# EAGLE board prototypeV2.32 (EAGLE 9.5.2)
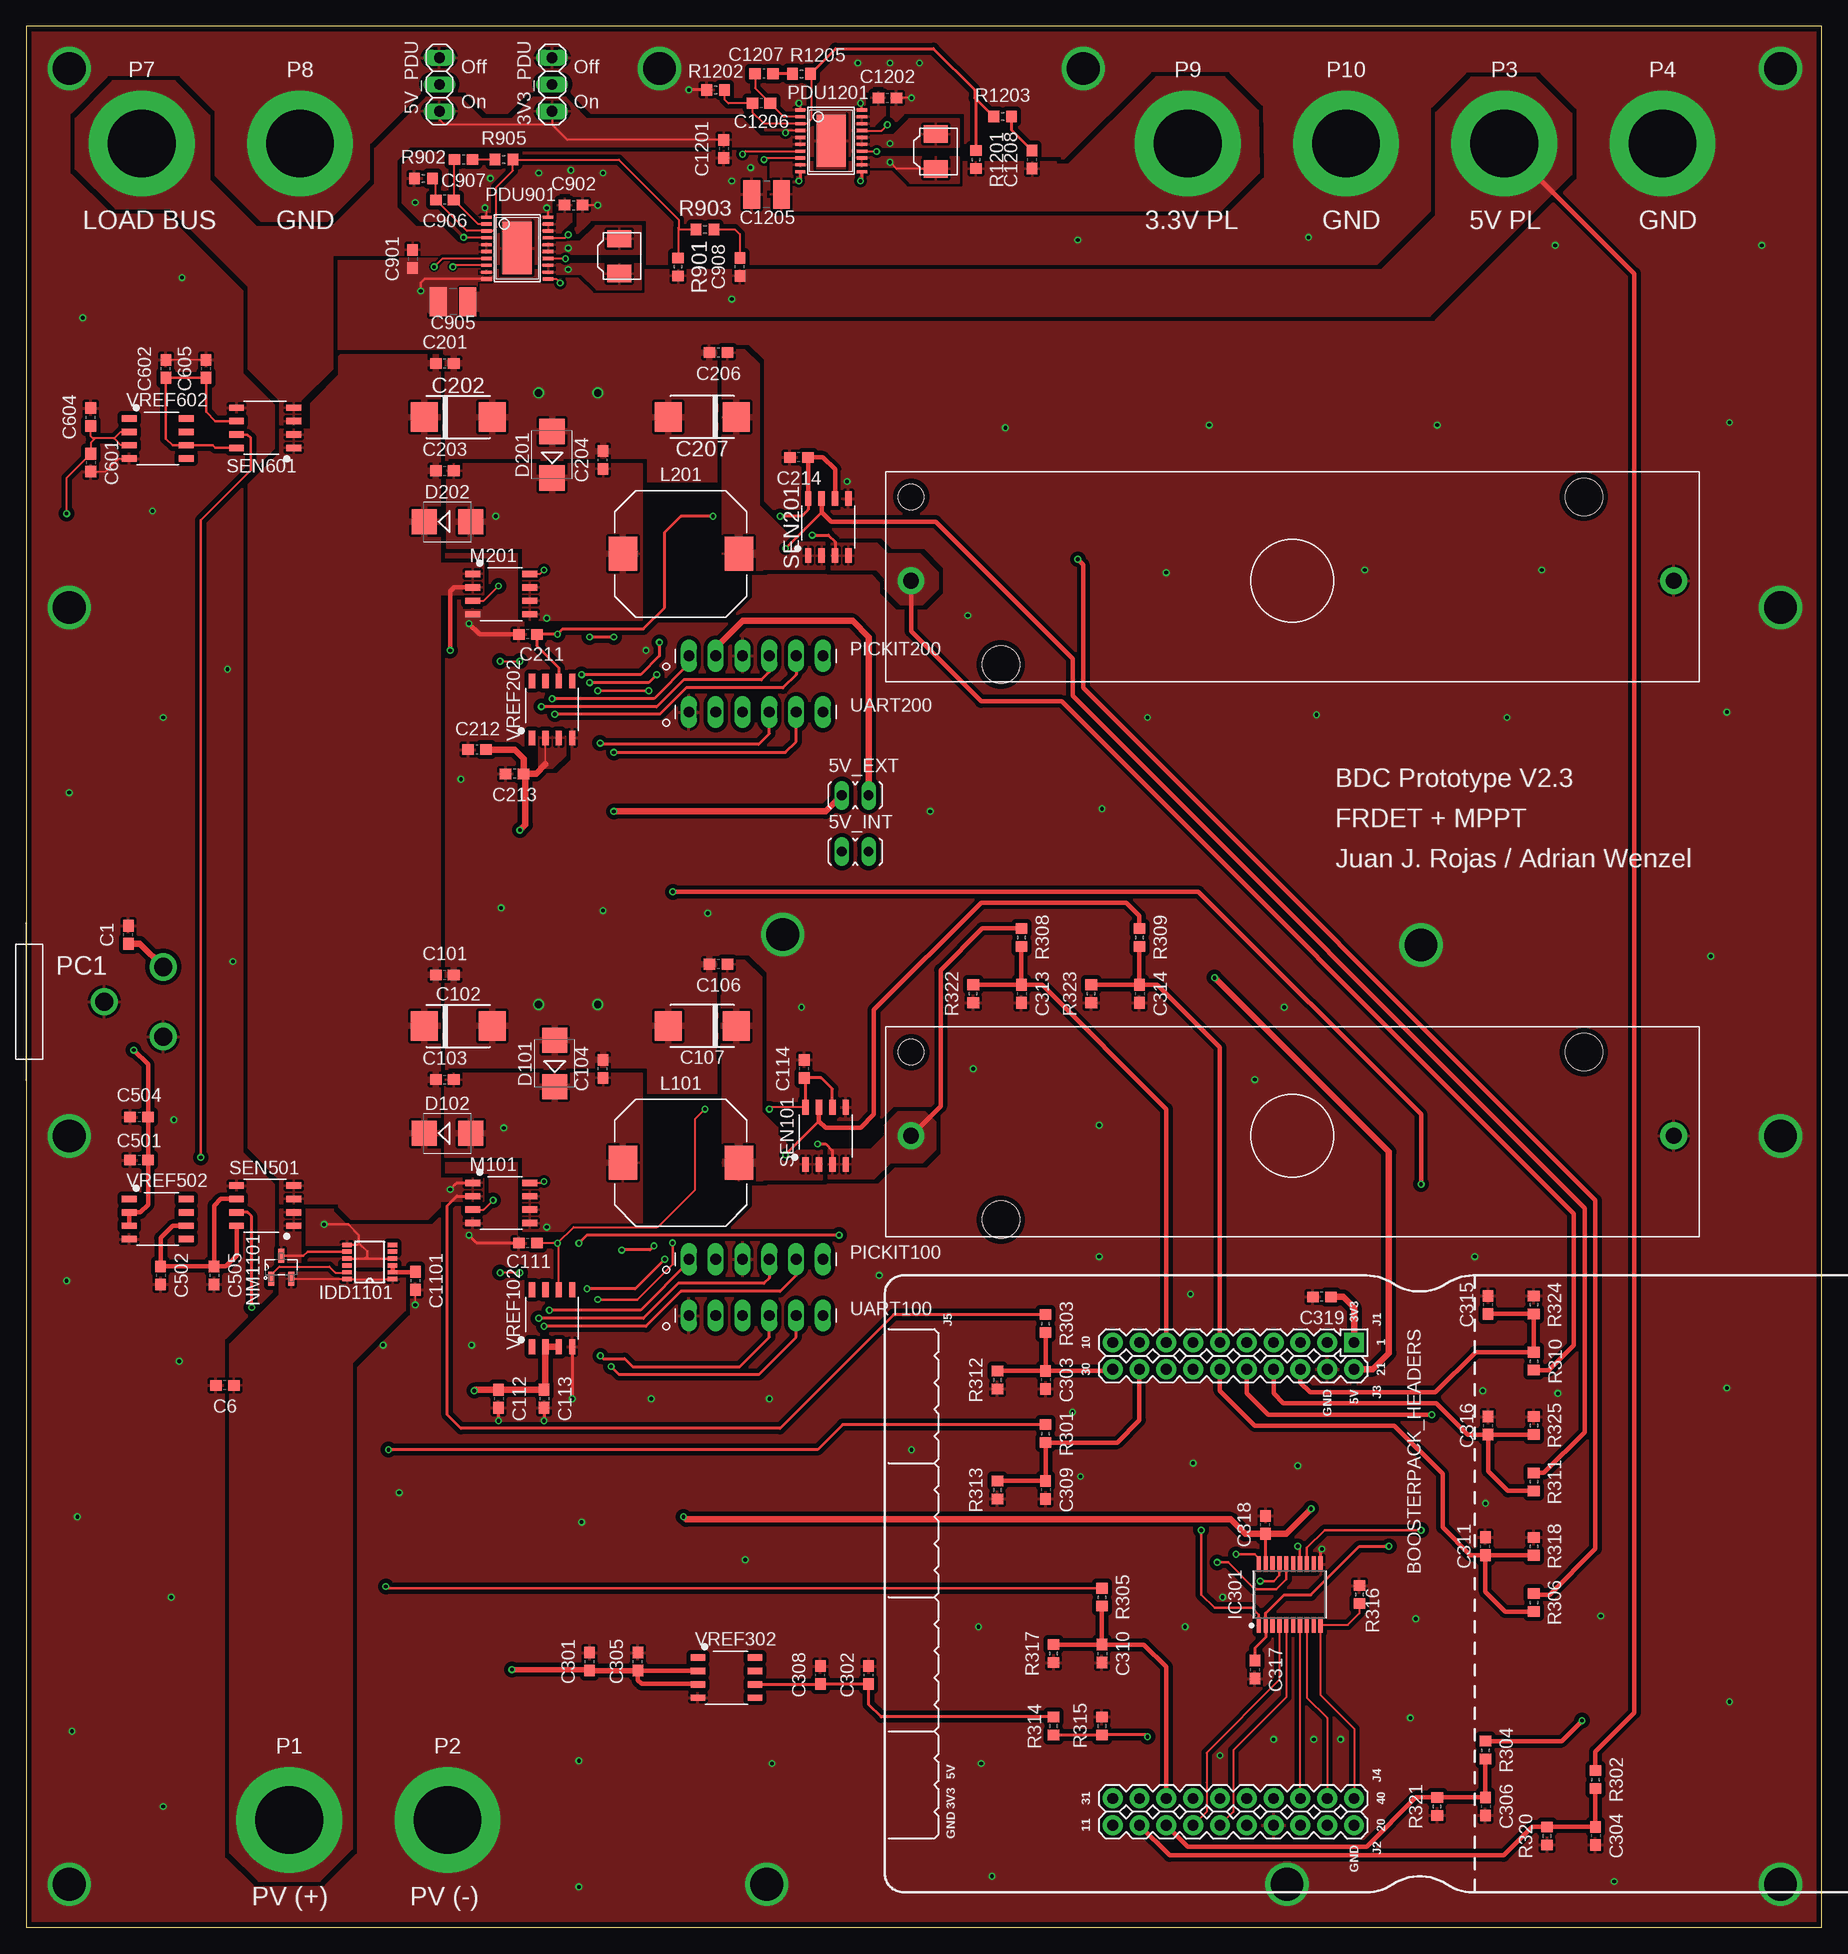
[diagram p0: board, top side]
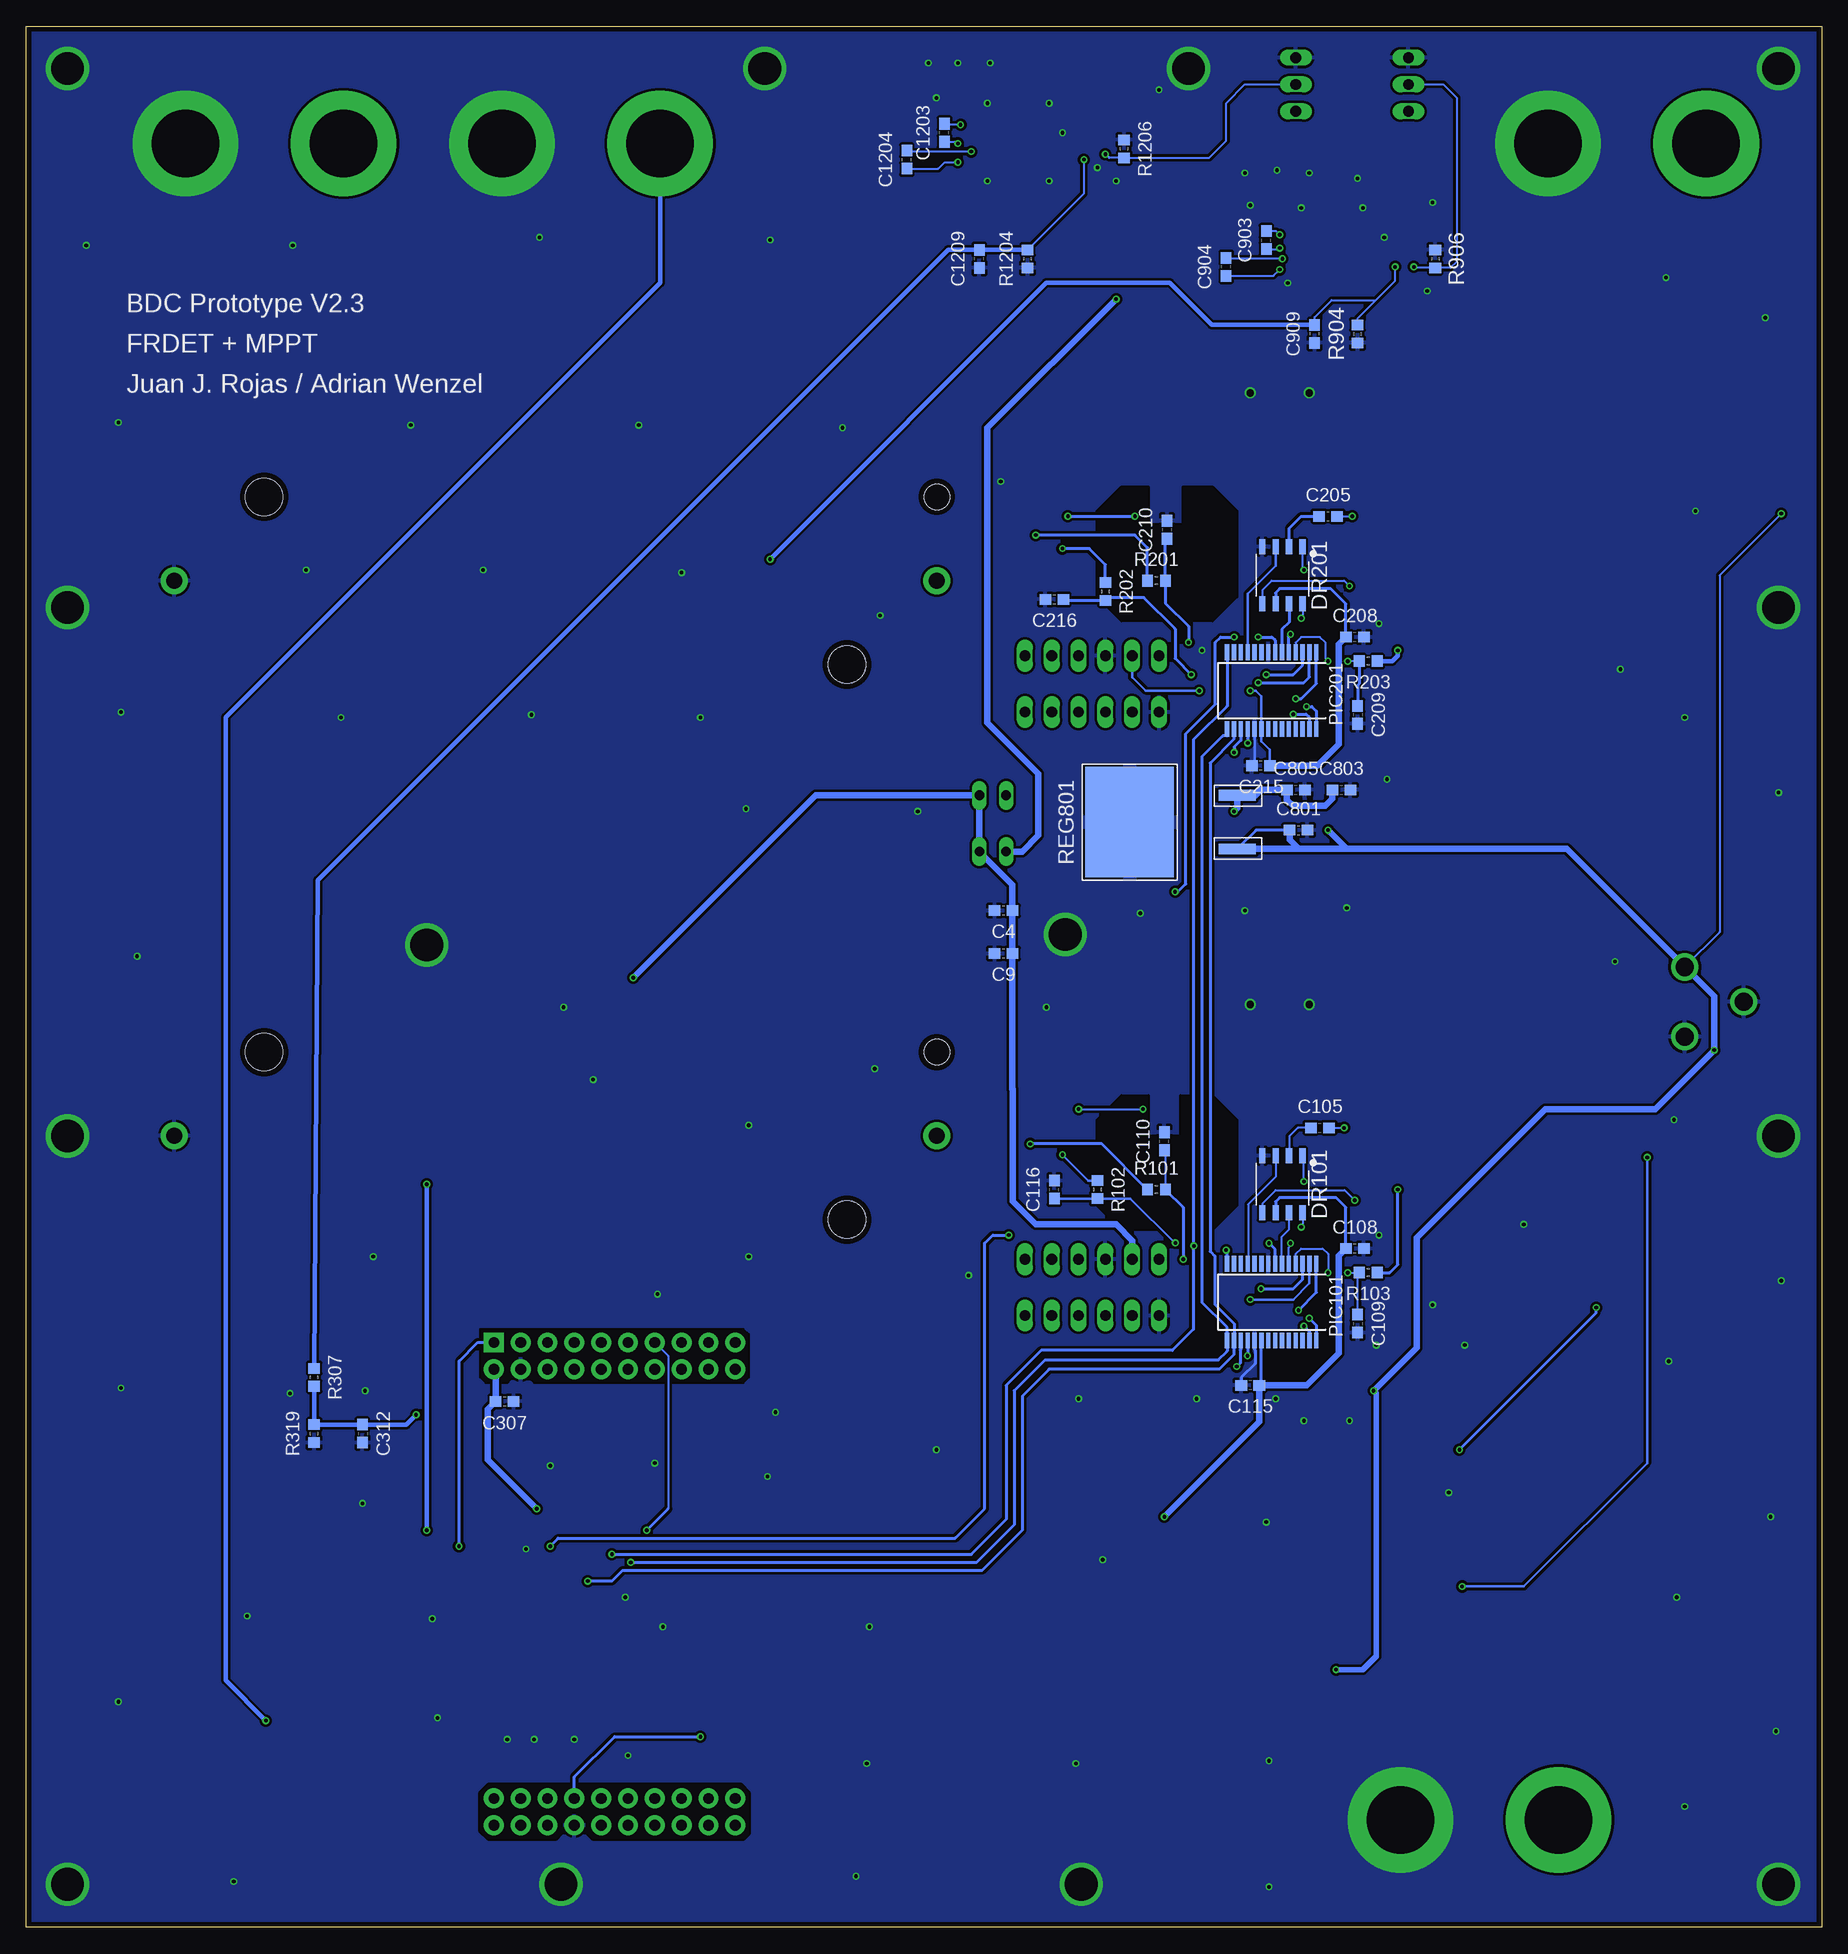
[diagram p1: board, bottom side, seen from below]

Size 170 x 180 mm. Coordinates in mm from the lower left corner, seen from the top.
Outline: 0,0 170,0 170,180 0,180 0,0
Copper layers (1*16): Top 0.035mm / dielectric 1.53mm / Bottom 0.035mm
Design rules "pban_5mil-l2": minimum track width 5mil, minimum drill 0.3mm, track to track 5mil, track to pad 0.229mm, pad to pad 5mil, via to via 5mil, smd to smd 5mil, copper to edge 0.5mm, drill to drill 0.5mm, minimum pad ring 0.15mm, minimum via ring 0.15mm, stop-mask expansion 4mil, vias tented up to drill 0.35mm, thermal gap 10mil

## Footprints (pad centres in the part's own frame; a part is rotated, then mirrored left to right if it is on the bottom)
1X03 = drill 1.016 long: 1 -2.54,0; 2 0,0; 3 2.54,0
J2P = drill 0.914 long: 1 0,-1.27; 2 0,1.27
C0603 = smd 1.1 x 1: 1 -0.85,0; 2 0.85,0
C7343 = smd 2.55 x 2.77: + -3.22,0; - 3.22,0
C1210 = smd 1.6 x 2.7: 1 -1.4,0; 2 1.4,0
18650_HOLDER = drill 1.5 pad 2.54: BB1.N 36.11,0; BB1.P -36.11,0 | hole 3.55: 27.6,7.935; -27.6,-7.935 | hole 2.4: -36.11,7.935
SMB = smd 2.4 x 2.4: A 2.2,0; C -2.2,0
SOIC-8 = smd 0.6 x 1.4: 1 -1.905,-2.7; 2 -0.635,-2.7; 3 0.635,-2.7; 4 1.905,-2.7; 5 1.905,2.7; 6 0.635,2.7; 7 -0.635,2.7; 8 -1.905,2.7
SOP65P640X120-20 = smd 1.469 x 0.402: 1 -2.871,2.925; 2 -2.871,2.275; 3 -2.871,1.625; 4 -2.871,0.975; 5 -2.871,0.325; 6 -2.871,-0.325; 7 -2.871,-0.975; 8 -2.871,-1.625; 9 -2.871,-2.275; 10 -2.871,-2.925; 11 2.871,-2.925; 12 2.871,-2.275; 13 2.871,-1.625; 14 2.871,-0.975; 15 2.871,-0.325; 16 2.871,0.325; 17 2.871,0.975; 18 2.871,1.625; 19 2.871,2.275; 20 2.871,2.925
MSOP12 = smd 0.9 x 0.42: 1 -2.163,1.625; 2 -2.163,0.975; 3 -2.163,0.325; 4 -2.163,-0.325; 5 -2.163,-0.975; 6 -2.163,-1.625; 7 2.15,-1.625; 8 2.15,-0.975; 9 2.15,-0.325; 10 2.15,0.325; 11 2.15,0.975; 12 2.15,1.625
BOOSTERPACK_HEADERS = drill 1.016 pad 1.88: !RST 22.86,-19.05; +5V -20.32,-8.89; GND -20.32,-11.43; GND@1 22.86,-8.89; P1.5 -22.86,-24.13; P1.6 22.86,-21.59; P1.7 22.86,-24.13; P2.3 20.32,-24.13; P2.4 20.32,-13.97; P2.5 22.86,-11.43; P2.6 20.32,-11.43; P2.7 20.32,-8.89; P3.0 22.86,-13.97; P3.2 -22.86,-13.97; P3.3 -22.86,-16.51; P3.5 20.32,-29.21; P3.6 22.86,-31.75; P3.7 20.32,-31.75; P4.0 -20.32,-16.51; P4.1 -22.86,-19.05; P4.2 -20.32,-19.05; P4.3 -22.86,-21.59; P4.4 -20.32,-21.59; P4.5 -20.32,-24.13; P4.6 -22.86,-26.67; P4.7 -20.32,-26.67; P5.0 22.86,-26.67; P5.1 20.32,-26.67; P5.2 22.86,-29.21; P5.4 -20.32,-29.21; P5.5 -20.32,-31.75; P5.6 20.32,-16.51; P5.7 22.86,-16.51; P6.0 -22.86,-11.43; P6.1 -20.32,-13.97; P6.4 -22.86,-31.75; P6.5 -22.86,-29.21; P6.6 20.32,-19.05; P6.7 20.32,-21.59 | drill 1.016 pad 1.88 square: +3V3 -22.86,-8.89
CLF12555 = smd 2.7 x 3.2: 1 -5.5,0; 2 5.5,0
SPM4020T = smd 1.65 x 2.3: 1 -1.65,0; 2 1.65,0
SOT-23 = smd 1.321 x 0.559: 1 -1.092,0.94; 2 -1.092,-0.94; 3 1.092,0
TJ-563 = drill 6.4 pad 10: P 0,0
722RA = drill 1.727: PIN 0,3.302; SLEEVE -5.588,0; SLEEVE_SHUNT 0,-3.302
TSSOP20CA = smd 0.305 x 0.991: 1 -2.925,-2.918; 2 -2.275,-2.918; 3 -1.625,-2.918; 4 -0.975,-2.918; 5 -0.325,-2.918; 6 0.325,-2.918; 7 0.975,-2.918; 8 1.625,-2.918; 9 2.275,-2.918; 10 2.925,-2.918; 11 2.925,2.918; 12 2.275,2.918; 13 1.625,2.918; 14 0.975,2.918; 15 0.325,2.918; 16 -0.325,2.918; 17 -0.975,2.918; 18 -1.625,2.918; 19 -2.275,2.918; 20 -2.925,2.918 | smd 4.95 x 2.74: 21 0,0
SSOP28 = smd 0.4 x 1.5: 1 -4.225,-3.625; 2 -3.575,-3.625; 3 -2.925,-3.625; 4 -2.275,-3.625; 5 -1.625,-3.625; 6 -0.975,-3.625; 7 -0.325,-3.625; 8 0.325,-3.625; 9 0.975,-3.625; 10 1.625,-3.625; 11 2.275,-3.625; 12 2.925,-3.625; 13 3.575,-3.625; 14 4.225,-3.625; 15 4.225,3.625; 16 3.575,3.625; 17 2.925,3.625; 18 2.275,3.625; 19 1.625,3.625; 20 0.975,3.625; 21 0.325,3.625; 22 -0.325,3.625; 23 -0.975,3.625; 24 -1.625,3.625; 25 -2.275,3.625; 26 -2.925,3.625; 27 -3.575,3.625; 28 -4.225,3.625
MA06-1 = drill 1.016 long: 1 -6.35,0; 2 -3.81,0; 3 -1.27,0; 4 1.27,0; 5 3.81,0; 6 6.35,0
R0603 = smd 1 x 1.1: 1 -0.85,0; 2 0.85,0
D2PAK-3 = smd 1.016 x 3.504: 1 -2.54,-10.213; 3 2.54,-10.213 | smd 10.49 x 8.38: 4 0,0

## Placement (x,y rotation side)
3V3_PDU  [1X03]  49.78,174.5 270 top
5V_EXT  [J2P]  78.49,107.19 270 top
5V_INT  [J2P]  78.49,101.85 270 top
5V_PDU  [1X03]  39.12,174.5 270 top
C1  10u  [C0603]  9.65,93.98 90 top
C4  0.1u  [C0603]  77.47,96.27 180 bottom
C6  1u  [C0603]  18.8,51.31 180 top
C9  10u  [C0603]  77.47,92.2 180 bottom
C101  1u  [C0603]  39.62,90.17 0 top
C102  33u  [C7343]  40.89,85.34 0 top
C103  1n  [C0603]  39.62,80.26 0 top
C104  1n  [C0603]  54.61,81.28 90 top
C105  1u  [C0603]  47.5,75.69 0 bottom
C106  1u  [C0603]  65.53,91.19 180 top
C107  33u  [C7343]  64.01,85.34 180 top
C108  2.2u  [C0603]  44.2,64.26 0 bottom
C109  0.1u  [C0603]  43.94,57.15 270 bottom
C110  0.1u  [C0603]  62.23,74.42 90 bottom
C111  1u  [C0603]  47.5,64.77 180 top
C112  10u  [C0603]  44.7,50.04 270 top
C113  1u  [C0603]  49.02,50.04 270 top
C114  0.1u  [C0603]  73.66,81.28 90 top
C115  0.1u  [C0603]  54.1,51.31 180 bottom
C116  1n  [C0603]  72.64,69.85 90 bottom
C201  1u  [C0603]  39.62,148.08 0 top
C202  33u  [C7343]  40.89,143 0 top
C203  1n  [C0603]  39.62,137.92 0 top
C204  1n  [C0603]  54.61,138.94 90 top
C205  1u  [C0603]  46.74,133.6 0 bottom
C206  1u  [C0603]  65.53,149.1 180 top
C207  33u  [C7343]  64.01,143 180 top
C208  2.2u  [C0603]  44.2,122.17 0 bottom
C209  0.1u  [C0603]  43.94,114.81 270 bottom
C210  0.1u  [C0603]  61.98,132.33 90 bottom
C211  1u  [C0603]  47.5,122.43 180 top
C212  10u  [C0603]  42.67,111.51 180 top
C213  1u  [C0603]  46.23,109.22 180 top
C214  0.1u  [C0603]  73.15,139.19 180 top
C215  0.1u  [C0603]  53.09,109.98 180 bottom
C216  1n  [C0603]  72.64,125.73 180 bottom
C301  10u  [C0603]  53.34,25.15 90 top
C302  1u  [C0603]  79.76,23.88 90 top
C303  1.2n  [C0603]  96.52,51.82 270 top
C304  1.2n  [C0603]  148.59,8.64 270 top
C305  1u  [C0603]  57.91,25.15 90 top
C306  1.2n  [C0603]  138.18,11.43 270 top
C307  0.1u  [C0603]  124.71,49.78 0 bottom
C308  0.1u  [C0603]  75.18,23.88 90 top
C309  1.2n  [C0603]  96.52,41.4 270 top
C310  1.2n  [C0603]  101.85,25.91 270 top
C311  1.2n  [C0603]  138.18,36.07 90 top
C312  1.2n  [C0603]  138.18,46.74 270 bottom
C313  1.2n  [C0603]  94.23,88.39 270 top
C314  1.2n  [C0603]  105.41,88.39 270 top
C315  1.2n  [C0603]  138.43,58.93 90 top
C316  1.2n  [C0603]  138.43,47.5 90 top
C317  0.1u  [C0603]  116.33,24.38 270 top
C318  0.1u  [C0603]  117.35,38.1 90 top
C319  0.1u  [C0603]  122.68,59.69 180 top
C501  10u  [C0603]  10.67,72.64 180 top
C502  1u  [C0603]  12.7,61.72 270 top
C504  1u  [C0603]  10.67,76.71 180 top
C505  0.1u  [C0603]  17.78,61.72 270 top
C601  10u  [C0603]  6.1,138.68 270 top
C602  1u  [C0603]  13.21,147.57 90 top
C604  1u  [C0603]  6.1,143 90 top
C605  0.1u  [C0603]  17.02,147.57 90 top
C801  0.33u  [C0603]  49.53,103.89 0 bottom
C803  1u  [C0603]  45.47,107.7 0 bottom
C805  10u  [C0603]  49.78,107.7 0 bottom
C901  10u  [C0603]  36.58,157.99 270 top
C902  1u  [C0603]  51.82,163.07 0 top
C903  0.1u  [C0603]  52.58,159.77 90 bottom
C904  0.1u  [C0603]  56.39,157.23 90 bottom
C905  47u  [C1210]  40.39,153.92 180 top
C906  22p  [C0603]  39.62,163.58 180 top
C907  680p  [C0603]  41.4,167.39 180 top
C908  47p  [C0603]  67.56,157.23 90 top
C909  100p  [C0603]  48.01,150.88 90 bottom
C1101  0.1u  [C0603]  36.83,61.21 270 top
C1201  22u  [C0603]  66.04,168.4 270 top
C1202  1u  [C0603]  81.53,173.23 0 top
C1203  0.1u  [C0603]  83.06,169.93 90 bottom
C1204  0.1u  [C0603]  86.61,167.39 90 bottom
C1205  47u  [C1210]  70.1,164.08 180 top
C1206  15p  [C0603]  69.6,172.72 180 top
C1207  820p  [C0603]  69.85,175.51 180 top
C1208  56p  [C0603]  95.25,167.39 90 top
C1209  100p  [C0603]  79.76,157.99 90 bottom
CELL1  CELL18650_HOLDER  [18650_HOLDER]  119.89,74.93 0 top
CELL2  CELL18650_HOLDER  [18650_HOLDER]  119.89,127.51 0 top
D101  BAQ133  [SMB]  50.04,81.79 90 top
D102  BAQ133  [SMB]  39.88,75.18 0 top
D201  BAQ133  [SMB]  49.78,139.45 90 top
D202  BAQ133  [SMB]  39.88,133.1 0 top
DR101  TPS28225D  [SOIC-8]  51.05,70.36 180 bottom
DR201  TPS28225D  [SOIC-8]  51.05,128.02 180 bottom
IC301  TXS0108E  [SOP65P640X120-20]  119.63,31.5 90 top
IDD1101  LTC4352CMS  [MSOP12]  32.51,62.99 180 top
JP301  BOOSTERPACK_HEADERS  [BOOSTERPACK_HEADERS]  134.62,32.51 270 top
L101  22u  [CLF12555]  61.98,72.39 0 top
L201  22u  [CLF12555]  61.98,130.05 0 top
L901  4.7u  [SPM4020T]  56.13,158.24 270 top
L1201  4.7u  [SPM4020T]  86.11,168.15 270 top
M101  SI4914BDY  [SOIC-8]  44.96,68.58 270 top
M201  SI4914BDY  [SOIC-8]  44.96,126.24 270 top
NM1101  IRLML6244TRPBF  [SOT-23]  24.13,62.48 90 top
P1  TJ-563  [TJ-563]  24.89,10.16 0 top
P2  TJ-563  [TJ-563]  39.88,10.16 0 top
P3  TJ-563  [TJ-563]  139.95,168.91 0 top
P4  TJ-563  [TJ-563]  154.94,168.91 0 top
P7  TJ-563  [TJ-563]  10.92,168.91 0 top
P8  TJ-563  [TJ-563]  25.91,168.91 0 top
P9  TJ-563  [TJ-563]  109.98,168.91 0 top
P10  TJ-563  [TJ-563]  124.97,168.91 0 top
PC1  722RA  [722RA]  12.95,87.63 0 top
PDU901  LTC3112EFE  [TSSOP20CA]  46.48,159 270 top
PDU1201  LTC3112EFE  [TSSOP20CA]  76.2,169.16 270 top
PIC101  PIC16F1786-I/SS  [SSOP28]  52.07,59.18 180 bottom
PIC201  PIC16F1786-I/SS  [SSOP28]  52.07,117.09 180 bottom
PICKIT100  [MA06-1]  69.09,63.25 0 top
PICKIT200  [MA06-1]  69.09,120.4 0 top
R101  200  [R0603]  62.99,69.85 0 bottom
R102  0  [R0603]  68.58,69.85 270 bottom
R103  200  [R0603]  42.93,61.98 180 bottom
R201  200  [R0603]  62.99,127.51 0 bottom
R202  0  [R0603]  67.82,126.49 270 bottom
R203  200  [R0603]  42.93,119.89 180 bottom
R301  12.4k  [R0603]  96.52,46.74 270 top
R302  23.2k  [R0603]  148.59,13.97 270 top
R303  23.2k  [R0603]  96.52,57.15 270 top
R304  12.4k  [R0603]  138.18,16.76 270 top
R305  12.4k  [R0603]  101.85,31.24 270 top
R306  12.4k  [R0603]  142.75,30.73 270 top
R307  12.4k  [R0603]  142.75,52.07 270 bottom
R308  12.4k  [R0603]  94.23,93.73 270 top
R309  12.4k  [R0603]  105.41,93.73 270 top
R310  12.4k  [R0603]  142.75,53.59 90 top
R311  12.4k  [R0603]  142.75,42.16 270 top
R312  23.2k  [R0603]  91.95,51.82 90 top
R313  23.2k  [R0603]  91.95,41.4 90 top
R314  12.4k  [R0603]  97.28,19.05 90 top
R315  23.2k  [R0603]  101.85,19.05 270 top
R316  10k  [R0603]  126.24,31.5 270 top
R317  23.2k  [R0603]  97.28,25.91 90 top
R318  23.2k  [R0603]  142.75,36.07 270 top
R319  23.2k  [R0603]  142.75,46.74 90 bottom
R320  23.2k  [R0603]  144.02,8.64 90 top
R321  23.2k  [R0603]  133.6,11.43 90 top
R322  23.2k  [R0603]  89.66,88.39 90 top
R323  23.2k  [R0603]  100.84,88.39 90 top
R324  23.2k  [R0603]  142.75,58.93 270 top
R325  23.2k  [R0603]  142.75,47.5 270 top
R901  845k  [R0603]  61.72,157.23 270 top
R902  158k  [R0603]  37.59,165.61 0 top
R903  10k  [R0603]  64.26,160.78 0 top
R904  42.2k  [R0603]  43.94,150.88 90 bottom
R905  33k  [R0603]  45.21,167.39 0 top
R906  10k  [R0603]  36.58,157.99 270 bottom
R1201  620k  [R0603]  89.92,167.39 270 top
R1202  200k  [R0603]  65.28,173.99 0 top
R1203  9.1k  [R0603]  92.46,171.45 0 top
R1204  42.2k  [R0603]  75.18,157.99 90 bottom
R1205  39k  [R0603]  73.41,175.51 0 top
R1206  10k  [R0603]  66.04,168.4 270 bottom
REG801  NCV7805BD2TG  [D2PAK-3]  65.53,104.65 90 bottom
SEN101  ACS723-05AB-T  [SOIC-8]  75.69,74.93 0 top
SEN201  ACS723-05AB-T  [SOIC-8]  75.95,132.59 0 top
SEN501  ACS723-05AB-T  [SOIC-8]  22.61,68.33 90 top
SEN601  ACS723-05AB-T  [SOIC-8]  22.61,141.99 90 top
UART100  [MA06-1]  69.09,57.91 0 top
UART200  [MA06-1]  69.09,115.06 0 top
VREF102  REF195GSZ  [SOIC-8]  49.78,57.66 0 top
VREF202  REF195GSZ  [SOIC-8]  49.78,115.32 0 top
VREF302  REF195GSZ  [SOIC-8]  66.29,23.62 270 top
VREF502  REF195GSZ  [SOIC-8]  12.45,67.06 270 top
VREF602  REF195GSZ  [SOIC-8]  12.45,140.97 270 top

## Library data of the parts
3V3_PDU 5V_PDU = pinhead
5V_EXT 5V_INT P1-P4 P7-P10 PC1 = Interfaces
C1 C4 C6 C9 C101-C116 C201-C216 C301-C319 C501 C502 C504 C505 C601 C602 C604 C605 C801 C803 C805 C901-C909 C1101 C1201-C1209 D101 D102 D201 D202 L101 L201 L901 L1201 R101-R103 R201-R203 R301-R325 R901-R906 R1201-R1206 = Pasives
CELL1 CELL2 = Sources
DR101 DR201 IDD1101 M101 M201 PDU901 PDU1201 PIC101 PIC201 REG801 SEN101 SEN201 SEN501 SEN601 VREF102 VREF202 VREF302 VREF502 VREF602 = ICs
IC301 = TI_LevelShifter
JP301 = MSP432_aux
NM1101 = ICs; RS_SN: 737-7228
PICKIT100 PICKIT200 UART100 UART200 = Interfaces; OC_FARNELL: unknown; OC_NEWARK: unknown

## Nets
3.3V_PL: C1205.1 C1208.1 P9.P PDU1201.9 R304.1 R1201.2
5V_EXT: 5V_EXT.1 C803.1 C805.1 REG801.3
5V_ON: 5V_PDU.2 PDU901.7 R906.2
5V_PL: 5V_INT.1 C905.1 C908.1 P3.P PDU901.9 R302.1 R901.2
7.5V: C1.1 C112.1 C113.1 C212.1 C213.1 C301.1 C305.1 C501.1 C504.1 C601.1 C604.1 C801.1 PC1.PIN REG801.1 VREF102.2 VREF102.3 VREF202.2 VREF202.3 VREF302.2 VREF302.3 VREF502.2 VREF502.3 VREF602.2 VREF602.3
12V_ON: 3V3_PDU.2 PDU1201.7 R1206.2
!SPI_SS1: IC301.14 PIC101.7
!SPI_SS2: IC301.13 PIC201.7
+5V: 5V_EXT.2 5V_INT.2 C4.1 C9.1 C108.1 C115.1 C208.1 C215.1 C307.1 C318.1 DR101.6 DR201.6 IC301.19 JP301.+5V PIC101.20 PIC201.20 PICKIT100.2 PICKIT200.2
CONTROL:3V3: C317.1 C319.1 IC301.2 JP301.+3V3
CONTROL:3V3_REF: JP301.P5.6 R314.1 R315.2
CONTROL:5V_REF: C302.1 C308.1 R314.2 VREF302.6
CONTROL:!SS1: IC301.7 JP301.P2.4
CONTROL:!SS2: IC301.8 JP301.P2.6
CONTROL:CLK: IC301.1 JP301.P1.5
CONTROL:I_BAT1: C314.1 JP301.P4.3 R309.2 R323.2
CONTROL:I_BAT2: C316.1 JP301.P4.0 R311.2 R325.2
CONTROL:I_LOAD: C310.1 JP301.P5.1 R305.2 R317.2
CONTROL:I_PDU_3.3V: C312.1 JP301.P4.2 R307.2 R319.2
CONTROL:I_PDU_5V: C311.1 JP301.P4.4 R306.2 R318.2
CONTROL:I_PV: C309.1 JP301.P5.4 R301.2 R313.2
CONTROL:MISO: IC301.4 JP301.P1.7
CONTROL:MOSI: IC301.5 JP301.P1.6
CONTROL:OE_SPI: IC301.10 JP301.P2.7 R316.2
CONTROL:V_BAT1: C313.1 JP301.P4.6 R308.2 R322.2
CONTROL:V_BAT2: C315.1 JP301.P6.1 R310.2 R324.2
CONTROL:V_BUS: C303.1 JP301.P5.5 R303.2 R312.2
CONTROL:V_PDU_3.3V: C306.1 JP301.P5.0 R304.2 R321.2
CONTROL:V_PDU_5V: C304.1 JP301.P5.2 R302.2 R320.2
CONV1:5V_REF: C111.1 C114.1 PIC101.5 SEN101.6 SEN101.8 VREF102.6
CONV1:DR_EN: DR101.7 PIC101.6
CONV1:G1: DR101.1 M101.8
CONV1:G2: DR101.5 M101.3
CONV1:I_BAT: C116.1 PIC101.2 R102.2
CONV1:ICSPCLK: PIC101.27 PICKIT100.5
CONV1:ICSPDAT: PIC101.28 PICKIT100.4
CONV1:LO: C106.1 C107.+ L101.2 SEN101.1 SEN101.2
CONV1:MCLR: PIC101.1 PICKIT100.1
CONV1:N$2: C105.1 DR101.2
CONV1:PWM: DR101.3 PIC101.11
CONV1:RX: PIC101.18 UART100.4
CONV1:SW: C103.2 C104.1 C105.2 D101.C D102.A DR101.8 L101.1 M101.5 M101.6 M101.7
CONV1:TX: PIC101.17 UART100.5
CONV1:V_BAT: C110.1 PIC101.3 R101.2
CONV1:V_BUS: C109.1 PIC101.4 R103.2
CONV2:5V_REF: C211.1 C214.1 PIC201.5 SEN201.6 SEN201.8 VREF202.6
CONV2:DR_EN: DR201.7 PIC201.6
CONV2:G1: DR201.1 M201.8
CONV2:G2: DR201.5 M201.3
CONV2:I_BAT: C216.1 PIC201.2 R202.2
CONV2:ICSPCLK: PIC201.27 PICKIT200.5
CONV2:ICSPDAT: PIC201.28 PICKIT200.4
CONV2:LO: C206.1 C207.+ L201.2 SEN201.1 SEN201.2
CONV2:MCLR: PIC201.1 PICKIT200.1
CONV2:N$2: C205.1 DR201.2
CONV2:PWM: DR201.3 PIC201.11
CONV2:RX: PIC201.18 UART200.4
CONV2:SW: C203.2 C204.1 C205.2 D201.C D202.A DR201.8 L201.1 M201.5 M201.6 M201.7
CONV2:TX: PIC201.17 UART200.5
CONV2:V_BAT: C210.1 PIC201.3 R201.2
CONV2:V_BUS: C209.1 PIC201.4 R203.2
GND: 3V3_PDU.1 5V_PDU.1 C1.2 C4.2 C6.2 C9.2 C101.2 C102.- C104.2 C106.2 C107.- C108.2 C109.2 C110.2 C111.2 C112.2 C113.2 C114.2 C115.2 C116.2 C201.2 C202.- C204.2 C206.2 C207.- C208.2 C209.2 C210.2 C211.2 C212.2 C213.2 C214.2 C215.2 C216.2 C301.2 C302.2 C303.2 C304.2 C305.2 C306.2 C307.2 C308.2 C309.2 C310.2 C311.2 C312.2 C313.2 C314.2 C315.2 C316.2 C317.2 C318.2 C319.2 C501.2 C502.2 C504.2 C505.2 C601.2 C602.2 C604.2 C605.2 C801.2 C803.2 C805.2 C901.2 C902.2 C905.2 C909.1 C1101.2 C1201.2 C1202.2 C1205.2 C1209.1 CELL1.BB1.N CELL2.BB1.N D101.A D201.A DR101.4 DR201.4 IC301.11 IDD1101.4 IDD1101.7 IDD1101.9 JP301.GND JP301.P5.7 M101.4 M201.4 P2.P P4.P P8.P P10.P PC1.SLEEVE PC1.SLEEVE_SHUNT PDU901.1 PDU901.4 PDU901.10 PDU901.11 PDU901.20 PDU901.21 PDU1201.1 PDU1201.4 PDU1201.10 PDU1201.11 PDU1201.20 PDU1201.21 PIC101.8 PIC101.19 PIC201.8 PIC201.19 PICKIT100.3 PICKIT200.3 R312.1 R313.1 R315.1 R316.1 R317.1 R318.1 R319.1 R320.1 R321.1 R322.1 R323.1 R324.1 R325.1 R902.1 R904.1 R906.1 R1202.1 R1204.1 R1206.1 REG801.4 SEN101.5 SEN201.5 SEN501.5 SEN601.5 UART100.1 UART200.1 VREF102.4 VREF202.4 VREF302.4 VREF502.4 VREF602.4
IDEAL_D1:N$1: IDD1101.11 NM1101.1
IDEAL_D1:N$4: C1101.1 IDD1101.2 IDD1101.3
IS_BAT1: R102.1 R309.1 SEN101.7
IS_BAT2: R202.1 R311.1 SEN201.7
IS_LOAD: R305.1 SEN601.7
IS_PDU_3.3V: C1209.2 PDU1201.8 R307.1 R1204.2
IS_PDU_5V: C909.2 PDU901.8 R306.1 R904.2
IS_PV: R301.1 SEN501.7
LOAD_BUS: 3V3_PDU.3 5V_PDU.3 C901.1 C1201.1 P7.P PDU901.5 PDU901.6 PDU1201.5 PDU1201.6 SEN601.3 SEN601.4
N$6: IDD1101.8 NM1101.3 SEN501.1 SEN501.2
PDU_3.3V:N$1: C1203.2 PDU1201.17
PDU_3.3V:N$2: C1202.1 PDU1201.18 PDU1201.19
PDU_3.3V:N$3: C1204.2 PDU1201.14
PDU_3.3V:N$4: C1203.1 L1201.1 PDU1201.15 PDU1201.16
PDU_3.3V:N$5: C1207.1 R1205.1
PDU_3.3V:N$6: C1206.1 C1207.2 PDU1201.2
PDU_3.3V:N$7: C1204.1 L1201.2 PDU1201.12 PDU1201.13
PDU_3.3V:N$8: C1208.2 R1203.2
PDU_3.3V:N$9: C1206.2 PDU1201.3 R1201.1 R1202.2 R1203.1 R1205.2
PDU_5V:N$1: C903.2 PDU901.17
PDU_5V:N$2: C902.1 PDU901.18 PDU901.19
PDU_5V:N$3: C904.2 PDU901.14
PDU_5V:N$4: C903.1 L901.1 PDU901.15 PDU901.16
PDU_5V:N$5: C907.1 R905.1
PDU_5V:N$6: C906.1 C907.2 PDU901.2
PDU_5V:N$7: C904.1 L901.2 PDU901.12 PDU901.13
PDU_5V:N$8: C908.2 R903.2
PDU_5V:N$9: C906.2 PDU901.3 R901.1 R902.2 R903.1 R905.2
PV: C6.1 IDD1101.1 IDD1101.12 NM1101.2 P1.P
PV_BUS: C101.1 C102.+ C103.1 C201.1 C202.+ C203.1 D102.C D202.C M101.1 M101.2 M201.1 M201.2 R103.1 R203.1 R303.1 SEN501.3 SEN501.4 SEN601.1 SEN601.2
RX: JP301.P3.2
SENS_LOAD:5V_REF: C602.1 C605.1 SEN601.6 SEN601.8 VREF602.6
SENS_PV:5V_REF: C502.1 C505.1 SEN501.6 SEN501.8 VREF502.6
SPI_MISO: IC301.17 PIC101.16 PIC201.16
SPI_MOSI: IC301.16 PIC101.15 PIC201.15
SPI_SCLK: IC301.20 PIC101.14 PIC201.14
TX: JP301.P3.3
VS_BAT1: CELL1.BB1.P R101.1 R308.1 SEN101.3 SEN101.4
VS_BAT2: CELL2.BB1.P R201.1 R310.1 SEN201.3 SEN201.4

## Tracks (layer width: path | path; a pad name or v marks a point on that pad's centre or on a via)
3.3V_PL  (via drill 0.35)
  Top 0.406: v147.32,19.56 145.38,17.61 R304.1
  Bottom 0.406: P9.P 109.98,155.7 151.13,114.55 151.13,23.37 v147.32,19.56
  pour Top (isolate 0.254, rank 2): 97.5,167.14 70.5,167.14 70.5,162.59 97.5,162.59
  pour Top (isolate 0.254, no thermals): 97.2,166.89 98.68,166.89 106.98,175.19 113.45,175.19 116.62,172.02 116.72,166.13 113.17,162.59 97.2,162.59
5V_EXT  (via drill 0.35)
  Top 0.61: 5V_EXT.1 75.69,105.66 v55.63,105.66
  Bottom 0.61: v55.63,105.66 55.32,105.97 REG801.3 53.59,107.19 53.09,107.7 C805.1 50.63,106.77 50.04,106.17 46.99,106.17 46.32,106.85 C803.1
5V_ON  (via drill 0.35)
  Top 0.203: v38.61,157.23 39.41,158.03 PDU901.7
  Bottom 0.203: v38.61,157.23 38.52,157.14 R906.2 35.14,157.14 34.54,157.73 34.54,173.23 35.81,174.5 5V_PDU.2
5V_PL  (via drill 0.35)
  Top 0.406: R302.1 148.59,16.63 152.27,20.31 152.27,156.59 P3.P
  Bottom 0.61: 5V_INT.1 75.69,101.85 74.17,103.38 74.17,109.22 78.99,114.05 78.99,141.99 v66.8,154.18
  pour Top (isolate 0.254, rank 2): 68.5,156.89 43.02,156.89 43.02,152.59 68.5,152.59
  pour Top (isolate 0.254, no thermals): 68.1,156.89 128.3,156.89 133.51,162.09 133.51,171.81 136.84,175.14 142.91,175.14 146.3,171.75 146.3,165.99 132.9,152.59 68.1,152.59
  pour Top (isolate 0.254, no thermals): 49.53,154.69 41.4,154.69 41.4,153.16 49.53,153.16
7.5V  (via drill 0.35)
  Top 0.152: 49.15,110.11 VREF202.2
  Top 0.2: VREF602.3 8.95,140.34 8.3,140.99 | C604.1 6.1,141.19 6.3,140.99 6.5,140.99 | 8.3,140.99 6.5,140.99 | 6.5,140.99 6.1,140.58 C601.1 3.81,137.25 v3.81,133.86 | 8.3,140.99 8.92,141.6 VREF602.2
  Top 0.406: VREF502.3 VREF502.2 10.79,67.69 11.52,68.41 C501.1 C504.1 11.52,81.7 v10.16,83.06 | C301.1 53.25,24.38 | VREF302.2 57.95,24.26 C305.1 57.91,23.37 58.25,23.03 63.55,23.03 VREF302.3
  Top 0.508: 53.25,24.38 v45.97,24.38 | C305.1 C301.1
  Top 0.61: v46.74,103.89 47.24,104.39 47.24,109.05 C213.1 | C213.1 47.08,110.66 46.23,111.51 C212.1 | C213.1 48.26,109.22 49.15,110.11 | VREF102.3 VREF102.2 49.15,51.02 C113.1 C112.1 42.51,50.89 v42.42,50.8 | PC1.PIN 10.76,93.13 C1.1
  Bottom 0.2: PC1.PIN 9.65,94.23 9.65,128.02 v3.81,133.86
  Bottom 0.3: C801.1 53.54,103.89 REG801.1
  Bottom 0.508: v42.42,50.8 42.16,50.55 42.16,25.65 43.43,24.38 v45.97,24.38
  Bottom 0.61: 49.53,102.11 REG801.1 | 49.53,102.11 50.38,102.96 C801.1 | 44.96,102.11 24.13,102.11 PC1.PIN 10.16,88.14 v10.16,83.06 15.75,77.47 26.16,77.47 38.35,65.28 38.35,54.86 v42.42,50.8 | 49.53,102.11 44.96,102.11 | 44.96,102.11 v46.74,103.89
  pour Top (isolate 0.254): 48.51,112.78 51.05,112.78 51.05,111 49.78,109.73 48.51,109.73
12V_ON  (via drill 0.35)
  Top 0.203: PDU1201.7 68.11,168.19 v67.82,167.89
  Bottom 0.203: v67.82,167.89 67.48,167.55 R1206.2 58,167.55 56.39,169.16 56.39,172.72 54.61,174.5 3V3_PDU.2
!SPI_SS1  (via drill 0.35)
  Top 0.254: IC301.14 120.61,35.85 v120.4,36.07
  Top 0.305: v76.96,65.53 53.09,65.53 v52.32,64.77
  Bottom 0.305: v120.4,36.07 119.63,36.83 82.04,36.83 79.25,39.62 79.25,64.77 78.49,65.53 v76.96,65.53 | PIC101.7 51.74,64.19 v52.32,64.77
!SPI_SS2  (via drill 0.35)
  Top 0.254: IC301.13 121.26,35.91 122.94,37.59 v132.08,37.59
  Top 0.305: v55.63,122.17 v53.34,122.17
  Top 0.406: v61.21,98.04 111,98.04 132.08,76.96 v132.08,70.36
  Bottom 0.305: v61.21,98.04 60.96,98.04 60.2,98.81 60.2,113.03 57.4,115.82 57.4,121.67 56.9,122.17 v55.63,122.17 | v53.34,122.17 52.07,122.17 51.74,121.85 PIC201.7
  Bottom 0.406: v132.08,70.36 v132.08,37.59
+5V  (via drill 0.35, 0.35 pad 0.65)
  Top 0.254: v58.93,117.09 v54.1,117.09
  Top 0.305: IC301.19 117.36,37.24 C318.1
  Top 0.61: v121.67,39.62 119.29,37.25 C318.1 115.4,37.25 114.05,38.61 62.48,38.61 v62.23,38.86 | JP301.+5V 127.51,52.83 129.03,54.36 129.03,73.41 v112.52,89.92 | 5V_EXT.2 79.76,122.17 78.23,123.7 67.82,123.7 65.28,121.16 PICKIT200.2
  Bottom 0.254: PICKIT200.2 65.28,118.36 64.01,117.09 v58.93,117.09 | v54.1,117.09 53.59,117.09 53.05,116.55 PIC201.20 53.05,112.31 52.24,111.51 C215.1
  Bottom 0.305: C115.1 53.05,51.52 PIC101.20 | C108.1 45.05,68.16 45.97,69.09 51.31,69.09 51.69,68.71 DR101.6 | C208.1 45.05,125.31 46.48,126.75 51.31,126.75 51.69,126.36 DR201.6
  Bottom 0.61: JP301.+5V 125.56,52.67 C307.1 126.33,49.02 126.33,44.28 v121.67,39.62 | v112.52,89.92 95.25,107.19 5V_EXT.2 5V_INT.2 76.62,98.72 C4.1 C9.1 76.62,79.36 76.61,79.35 76.61,68.74 74.42,66.55 66.8,66.55 65.28,65.02 PICKIT100.2 | v62.23,38.86 53.25,47.84 C115.1 48.77,51.31 45.72,54.36 45.72,63.59 C108.1 | C215.1 47.75,109.98 45.72,112.01 45.72,121.5 C208.1
CONTROL:3V3  (via drill 0.35)
  Top 0.305: v129.03,36.07 126.24,36.07 121.65,31.47 119.1,31.47 117.36,29.73 IC301.2 117.36,27.44 116.33,26.42 C317.1
  Top 0.61: C319.1 124.71,59.69 125.73,58.67 JP301.+3V3
  Bottom 0.305: JP301.+3V3 127.25,55.37 129.03,53.59 v129.03,36.07
CONTROL:3V3_REF  (via drill 0.35)
  Top 0.305: R314.1 R315.2 106.01,18.2 v106.17,18.03
  Bottom 0.305: JP301.P5.6 118.11,14.22 114.3,18.03 v106.17,18.03
CONTROL:5V_REF
  Top 0.305: VREF302.6 75.14,22.99 C308.1 C302.1 79.76,21.08 80.94,19.9 R314.2
CONTROL:!SS1
  Top 0.203: IC301.7 120.61,12.23 JP301.P2.4
CONTROL:!SS2
  Top 0.203: IC301.8 121.26,21.74 123.19,19.81 JP301.P2.6
CONTROL:CLK  (via drill 0.35)
  Top 0.254: IC301.1 116.71,29.59 116.08,30.23 112.52,30.23 111.25,31.5 v111.25,37.59
  Bottom 0.2: JP301.P1.5 109.22,54.1 109.22,39.62
  Bottom 0.305: v111.25,37.59 109.22,39.62
CONTROL:I_BAT1
  Top 0.406: R323.2 C314.1 | C314.1 107.1,89.24 113.03,83.31 JP301.P4.3 | C314.1 R309.2
CONTROL:I_BAT2
  Top 0.406: JP301.P4.0 118.11,50.55 119.04,49.62 133.52,49.62 136.49,46.65 C316.1 | R311.2 140.3,41.31 138.43,43.18 C316.1 | R325.2 C316.1
CONTROL:I_LOAD
  Top 0.406: C310.1 105.83,26.76 107.95,24.64 JP301.P5.1 | R305.2 C310.1 | C310.1 R317.2
CONTROL:I_PDU_3.3V  (via drill 0.35)
  Top 0.406: JP301.P4.2 115.57,50.55 117.6,48.51 v133.1,48.51
  Bottom 0.406: R307.2 R319.2 C312.1 134.02,47.59 v133.1,48.51
CONTROL:I_PDU_5V
  Top 0.406: R306.2 140.04,29.88 138.18,31.75 C311.1 | R318.2 C311.1 | C311.1 136.74,35.22 134.11,37.85 134.11,42.93 129.54,47.5 116.33,47.5 113.03,50.8 JP301.P4.4
CONTROL:I_PV
  Top 0.406: R313.2 C309.1 R301.2 103.29,45.89 105.41,48.01 JP301.P5.4
CONTROL:MISO
  Top 0.2: 111.76,13.72 111.76,10.92 JP301.P1.7
  Top 0.203: IC301.4 118.66,23.41 111.76,16.51 111.76,13.72
CONTROL:MOSI
  Top 0.2: 114.3,13.72 114.3,10.92 JP301.P1.6
  Top 0.203: IC301.5 119.31,21.77 114.3,16.76 114.3,13.72
CONTROL:OE_SPI
  Top 0.203: JP301.P2.7 125.73,18.8 122.56,21.97 IC301.10 125.14,28.62 126.24,29.72 R316.2
CONTROL:V_BAT1
  Top 0.406: R322.2 C313.1 | C313.1 96.18,89.24 107.95,77.47 JP301.P4.6 | C313.1 R308.2
CONTROL:V_BAT2
  Top 0.406: JP301.P6.1 120.65,51.56 121.58,50.63 133.44,50.63 137.25,54.44 R310.2 R324.2 C315.1
CONTROL:V_BUS
  Top 0.406: C303.1 102.7,52.67 | C303.1 R303.2 | R312.2 C303.1
  Top 0.61: 102.7,52.67 JP301.P5.5
CONTROL:V_PDU_3.3V
  Top 0.406: JP301.P5.0 109.98,7.62 126.91,7.62 131.57,12.28 R321.2 C306.1 R304.2
CONTROL:V_PDU_5V
  Top 0.406: JP301.P5.2 108.26,6.8 139.9,6.8 142.58,9.49 R320.2 C304.1 R302.2
CONV1:5V_REF  (via drill 0.35)
  Top 0.2: VREF102.6 50.42,64.64 v50.29,64.77 C111.1
  Top 0.203: SEN101.8 70.52,77.63 v70.36,77.47 | v64.26,77.47 63.3,76.51 63.3,69.79 59.88,66.36 59.81,66.29 59.69,66.29 | 59.69,66.29 51.82,66.29 v50.29,64.77 | 59.69,66.29
  Top 0.305: SEN101.6 76.33,79.38 75.27,80.43 C114.1 73.79,80.3 SEN101.8
  Bottom 0.203: v70.36,77.47 v64.26,77.47 | PIC101.5 50.45,64.36 50.29,64.52 v50.29,64.77
CONV1:DR_EN
  Bottom 0.2: PIC101.6 51.09,65.39 50.42,66.07 DR101.7
CONV1:G1  (via drill 0.35)
  Top 0.2: M101.8 48.9,70.48 v49.02,70.61
  Bottom 0.2: v49.02,70.61 49.02,72.93 DR101.1
CONV1:G2  (via drill 0.35)
  Top 0.2: M101.3 43.31,67.94 v44.2,68.83
  Bottom 0.2: v44.2,68.83 45.16,69.79 51.69,69.79 52.96,68.53 DR101.5
CONV1:I_BAT  (via drill 0.35)
  Top 0.254: v61.19,64.8 61.19,62.76 57.86,59.44 v54.1,59.44
  Bottom 0.254: PIC101.2 48.49,60.98 50.04,59.44 v54.1,59.44 | C116.1 R102.2 65.44,69 61.24,64.8 v61.19,64.8
CONV1:ICSPCLK  (via drill 0.35)
  Top 0.305: PICKIT100.5 72.9,61.72 71.37,60.2 61.98,60.2 58.67,56.9 v49.02,56.9
  Bottom 0.305: PIC101.27 48.49,56.4 48.99,56.9 v49.02,56.9
CONV1:ICSPDAT  (via drill 0.35)
  Top 0.305: PICKIT100.4 70.36,61.47 69.85,60.96 61.72,60.96 58.42,57.66 v48.51,57.66
  Bottom 0.305: v48.51,57.66 47.84,56.99 PIC101.28
CONV1:LO
  pour Top (isolate 0.254): 65.9,91.59 68,91.59 69.65,89.93 69.65,76.53 72.59,73.59 75.35,73.59 75.35,70.78 69.79,70.78 69.7,70.69 65.9,70.69
  pour Top (isolate 0.254): 66.29,75.18 66.29,71.12 70.61,71.12 70.61,75.18
  pour Top (isolate 0.254): 66.04,88.14 66.04,82.55 69.34,82.55 69.34,88.14
  pour Top (isolate 0.254, no thermals): 71.12,75.18 71.12,75.69 69.09,77.72 69.09,75.44 69.34,75.18
CONV1:MCLR  (via drill 0.35)
  Top 0.305: PICKIT100.1 62.74,62.99 58.17,58.42 v49.53,58.42
  Bottom 0.305: v49.53,58.42 47.84,60.1 PIC101.1
CONV1:N$2
  Bottom 0.2: C105.1 49.59,75.69 50.4,74.89 50.4,73.08 DR101.2
CONV1:PWM
  Bottom 0.2: DR101.3 51.69,71.05 54.3,68.44 54.3,62.85 PIC101.11
CONV1:RX  (via drill 0.35)
  Top 0.305: v54.36,54.1 54.61,53.85 56.64,53.85 57.4,53.09 67.56,53.09 70.36,55.88 UART100.4
  Bottom 0.305: PIC101.18 54.34,54.11 v54.36,54.1
CONV1:SW  (via drill 0.35)
  Bottom 0.2: DR101.8 49.15,66.42 v49.28,66.29 | C105.2 v45.21,75.69
  pour Top (isolate 0.254): 39.6,80.89 39.6,72.89 47,72.89 47,65.91 58.3,65.91 58.3,80.89
  pour Top (isolate 0.254): 46.74,80.26 46.74,78.23 40.13,78.23 40.13,73.15 53.85,73.15 53.85,69.6 57.91,74.68 57.91,75.95 53.09,75.95 53.09,80.26
CONV1:TX  (via drill 0.35)
  Top 0.305: UART100.5 72.9,55.88 69.34,52.32 56.13,52.32 v55.37,53.09
  Bottom 0.305: PIC101.17 54.99,54.72 55.06,54.65 55.06,53.4 v55.37,53.09
CONV1:V_BAT  (via drill 0.35)
  Top 0.305: v60.45,63.25 57.66,60.45 v53.09,60.45
  Bottom 0.203: R101.2 62.14,73.48 C110.1
  Bottom 0.305: v60.45,63.25 60.45,68.16 R101.2 | v53.09,60.45 50.04,60.45 49.15,61.34 PIC101.3
CONV1:V_BUS  (via drill 0.35)
  Top 0.203: v46.74,61.98 v44.86,61.98
  Bottom 0.2: R103.2 43.94,61.98 C109.1
  Bottom 0.203: v44.86,61.98 R103.2 | PIC101.4 49.78,62.82 49.78,63.75 49.28,64.26 47.24,64.26 46.74,63.75 v46.74,61.98
CONV2:5V_REF  (via drill 0.35)
  Top 0.305: SEN201.8 74.04,134.24 73.41,133.6 v71.37,133.6 | v65.02,133.6 61.98,133.6 60.45,132.08 60.45,124.97 58.42,122.94 50.8,122.94 v50.29,122.43 C211.1 48.35,121.32 50.42,119.25 VREF202.6
  Top 0.406: SEN201.6 76.58,138.05 75.44,139.19 C214.1 74.04,139.15 SEN201.8
  Bottom 0.305: v71.37,133.6 v65.02,133.6 | PIC201.5 50.45,122.28 v50.29,122.43
CONV2:DR_EN
  Bottom 0.305: DR201.7 50.42,123.57 51.09,122.89 PIC201.6
CONV2:G1  (via drill 0.35)
  Top 0.203: M201.8 48.64,128.14 v49.02,128.52
  Bottom 0.203: v49.02,128.52 49.15,128.65 DR201.1
CONV2:G2  (via drill 0.35)
  Top 0.203: M201.3 43.31,125.6 v44.7,127
  Bottom 0.203: v44.7,127 45.21,127.51 52.07,127.51 52.96,126.62 DR201.5
CONV2:I_BAT  (via drill 0.35)
  Top 0.305: v59.69,118.62 58.93,117.86 v53.34,117.86
  Bottom 0.305: v53.34,117.86 49.02,117.86 48.49,118.38 PIC201.2 | v59.69,118.62 61.21,120.14 61.21,122.94 64.19,125.91 67.55,125.91 R202.2 71.71,125.64 C216.1
CONV2:ICSPCLK  (via drill 0.35)
  Top 0.305: PICKIT200.5 72.9,118.62 71.63,117.35 62.48,117.35 60,114.86 v50.04,114.86
  Bottom 0.305: PIC201.27 48.56,113.54 48.51,113.59 48.51,114.55 48.82,114.86 v50.04,114.86
CONV2:ICSPDAT  (via drill 0.35)
  Top 0.305: PICKIT200.4 70.36,118.87 69.6,118.11 62.23,118.11 59.69,115.57 48.78,115.57 v48.77,115.58
  Bottom 0.305: v48.77,115.58 48.27,115.58 47.84,115.16 PIC201.28
CONV2:LO
  pour Top (isolate 0.254): 65.9,149.39 68,149.39 69.4,147.99 69.4,134.59 72.85,131.14 75.6,131.14 75.6,128.58 69.79,128.58 69.7,128.49 65.9,128.49
  pour Top (isolate 0.254): 66.55,132.84 66.55,129.03 70.1,129.03 70.1,132.84
  pour Top (isolate 0.254): 66.29,139.95 69.09,139.95 69.09,145.54 66.29,145.54
CONV2:MCLR  (via drill 0.35)
  Top 0.305: PICKIT200.1 62.74,119.63 59.44,116.33 v49.78,116.33
  Bottom 0.305: v49.78,116.33 49.28,116.33 47.84,117.76 PIC201.1
CONV2:N$2
  Bottom 0.305: DR201.2 50.42,132.46 49.28,133.6 C205.1
CONV2:PWM
  Bottom 0.254: PIC201.11 54.34,126.25 51.69,128.91 DR201.3
CONV2:RX  (via drill 0.35)
  Top 0.305: UART200.4 70.36,113.03 69.34,112.01 54.45,112.01 v54.34,112.13
  Bottom 0.305: PIC201.18 54.34,112.53 54.36,112.52 54.36,112.14 v54.34,112.13
CONV2:SW  (via drill 0.35)
  Bottom 0.2: C205.2 v44.45,133.6 | v49.28,123.95 49.15,124.08 DR201.8
  pour Top (isolate 0.254): 39.8,138.59 39.8,130.59 47,130.59 47,123.74 58.3,123.74 58.3,138.59
  pour Top (isolate 0.254): 56.13,132.59 57.66,132.59 57.66,132.33 57.66,127.51 54.36,127.51 54.36,132.59
  pour Top (isolate 0.254): 47.24,138.18 47.24,135.89 46.23,135.89 40.13,135.89 40.13,131.06 40.64,131.06 50.29,131.06 52.32,131.06 52.32,132.84 52.32,138.18 51.56,138.18
CONV2:TX  (via drill 0.35)
  Top 0.305: UART200.5 72.9,112.27 71.88,111.25 v55.63,111.25
  Bottom 0.305: PIC201.17 54.99,112.39 55.63,111.76 v55.63,111.25
CONV2:V_BAT  (via drill 0.35)
  Top 0.305: v59.94,121.67 59.94,120.4 58.17,118.62 v52.58,118.62
  Bottom 0.305: C210.1 62.14,131.32 R201.2 62.14,125.39 59.94,123.19 v59.94,121.67 | v52.58,118.62 50.04,118.62 49.15,119.51 PIC201.3
CONV2:V_BUS  (via drill 0.35)
  Top 0.203: v44.86,119.89 v46.74,119.89
  Bottom 0.203: R203.2 v44.86,119.89 | v46.74,119.89 46.99,120.14 46.99,121.67 47.5,122.17 49.28,122.17 49.8,121.66 PIC201.4
  Bottom 0.305: R203.2 43.78,117.77 43.94,117.6 C209.1
GND  (via drill 0.35, 0.7, 3.1 pad 4.1)
  Top 0.152: C1101.2 v36.83,58.93 | C605.2 C602.2 | VREF602.4 8.68,139.06 7.45,137.83 C601.2
  Top 0.2: PDU901.4 41.44,159.98 v41.4,160.02 | v43.43,162.81 43.56,162.68 PDU901.1 | PDU901.20 49.4,162.69 v49.28,162.81 | v54.1,163.07 C902.2 | v83.82,173.23 C1202.2 | v73.15,172.72 73.28,172.59 PDU1201.1 | PDU1201.20 79.12,172.6 v78.99,172.72
  Top 0.203: PDU1201.4 72.09,170.14 v71.88,169.93 | PDU901.11 50.17,156.08 v50.55,155.7
  Top 0.254: IDD1101.7 31.34,64.62 31.5,64.77 | 31.5,64.77 31.5,65.53 30.48,66.55 v28.19,66.55 | IDD1101.9 32.08,63.32 32.13,63.37 | 32.13,63.37 32.26,63.5 32.26,64.01 31.5,64.77 | IDD1101.4 32.19,63.32 32.13,63.37 | v37.34,154.94 37.34,155.7 37.72,156.08 PDU901.10
  Top 0.3: PDU1201.10 73.28,165.48 v73.15,165.35 | PDU1201.11 79.12,165.48 v78.99,165.35 | R1202.1 v62.74,173.99
  Top 0.305: v41.91,65.53 42.67,64.77 C111.2 | VREF102.4 v51.69,50.04 | IC301.11 122.56,35.69 v122.68,35.81 | C112.2 v44.7,47.95 | C113.2 v49.02,47.95
  Top 0.406: C211.2 42.93,122.43 v41.91,123.44
  Bottom 0.254: PIC201.19 53.7,112.44 53.66,112.41 53.66,110.26 C215.2
  Bottom 0.305: PIC101.19 53.7,54.69 53.65,54.65 53.65,53.37 54.95,52.07 C115.2
  other vias: 13.97,76.45 43.94,165.61 41.15,108.71 48.51,145.29 4.06,176.02 119.38,4.06 4.06,4.06 48.51,166.12 51.56,166.37 54.61,166.12 4.06,124.97 59.94,176.02 78.74,176.53 81.79,176.53 84.58,176.53 68.58,166.62 66.8,165.35 54.1,145.29 48.51,87.38 54.1,87.38 77.72,136.91 166.12,176.02 166.12,4.06 70.1,4.06 4.06,74.93 166.12,74.93 166.12,124.97 71.63,94 132.08,93 100.08,176.02 5.33,152.4 14.73,156.21 99.57,159.77 92.71,141.99 112.01,142.24 133.6,142.24 121.41,160.02 144.78,159.26 164.34,159.26 161.29,142.49 44.96,96.52 54.61,96.27 64.52,96.01 161.04,115.06 140.21,114.55 85.6,105.66 101.85,105.92 89.15,124.21 159.51,91.95 110.24,59.94 110.49,43.94 138.18,40.13 137.92,50.8 35.31,41.15 33.78,55.12 42.16,55.12 14.48,53.59 3.81,61.21 4.32,18.54 12.95,11.43 19.05,119.13 4.06,107.44 106.17,114.55 122.17,114.81 116.33,80.26 73.41,87.12 119.13,87.12 58.67,120.9 99.06,48.77 99.82,42.67 90.17,28.45 68.07,34.8 131.06,19.81 59.18,50.04 80.77,61.72 118.11,17.78 113.03,16.26 121.92,17.78 124.46,17.78 113.28,31.24 70.36,50.04 120.4,43.69 11.94,134.11 13.72,31.24 4.83,38.86 52.32,3.81 52.32,15.75 70.61,15.49 52.58,38.35 83.82,45.21 90.42,15.49 109.73,28.45 91.44,4.83 131.57,29.21 150.37,4.32 161.29,21.34 161.04,51.05 149.1,29.46 145.03,50.55 89.66,81.28 101.6,75.95 101.6,63.5 107.95,128.27 126.75,128.52 143.51,128.52 137.16,63.5 36.83,163.32 19.56,91.44 12.95,114.55
  pour Bottom (isolate 0.244): 0,0 0,179.99 170,179.99 170,0
  pour Top (isolate 0.305, no thermals): 45.1,156.59 45.1,164.09 47.7,166.69 55.7,166.69 55.7,164.19 49,164.19 47.7,162.89 47.7,156.59
  pour Top (isolate 0.254, no thermals): 74.9,166.59 74.9,174.09 77.8,176.99 85.5,176.99 85.5,174.49 79.1,174.49 77.5,172.89 77.5,166.59
  pour Top (isolate 0.254, rank 3): 65,168.79 73.7,168.79 73.7,162.59 68,162.59 65,165.59
  pour Top (isolate 0.15, rank 3, no thermals): 35.4,158.79 44.1,158.79 44.1,152.59 38.4,152.59 35.4,155.59
  pour Top (isolate 0.254, rank 2): 65.1,149.39 40.3,149.39 39.9,148.99 39.9,143.72 44.24,139.39 59.9,139.39 65.1,144.59
  pour Top (isolate 0.254, rank 2): 65.1,91.69 40.3,91.69 39.9,91.29 39.9,86.79 45,81.69 59.9,81.69 65.1,86.89
  pour Top (isolate 0.254): 77.2,133.92 77.2,137.89 79.98,137.89 79.98,133.92
  pour Top (isolate 0.15, no thermals): 41.3,124.74 43.1,124.74 43.1,123.49 42.45,122.84 41.3,122.84
  pour Top (isolate 0.254): 41.3,67.04 43.1,67.04 43.1,65.79 42.45,65.14 41.3,65.14
  pour Top (isolate 0.406, rank 3): 0,180.09 0,0 169.93,0 169.93,180.09
  cutout Bottom (isolate 0.254): 127,56.64 102.11,56.64 101.6,56.13 101.6,52.07 102.11,51.56 121.92,51.56 122.17,51.82 122.17,53.59 122.68,54.1 123.7,54.1 124.21,53.59 124.21,51.82 124.46,51.56 126.49,51.56 127,52.07
  cutout Bottom (isolate 0.254): 102.36,13.46 101.6,12.7 101.6,9.14 101.6,8.89 102.11,8.38 116.33,8.38 116.84,8.89 116.84,10.16 117.6,10.92 118.62,10.92 119.38,10.16 119.38,9.91 119.38,8.89 119.89,8.38 126.24,8.38 127,9.14 127,12.7 126.24,13.46
  pour Bottom (isolate 0.254): 60.2,111 60.2,98.04 71.37,98.04 71.37,111
  pour Top (isolate 0.305, no thermals): 40.13,3.81 42.93,3.81 45.97,6.86 45.97,13.46 45.72,13.72 43.18,16.26 40.39,16.26 36.83,16.26 35.05,14.48 33.78,13.21 33.78,7.37 37.34,3.81
  pour Bottom (isolate 0.305, no thermals): 40.13,3.81 42.93,3.81 45.97,6.86 45.97,13.46 45.72,13.72 43.18,16.26 40.39,16.26 36.83,16.26 35.05,14.48 33.78,13.21 33.78,7.37 37.34,3.81
  pour Bottom (isolate 0.305, no thermals): 152.15,162.81 157.73,162.81 160.78,165.86 160.78,171.7 157.99,174.5 151.64,174.5 149.1,171.96 149.1,165.86
  pour Bottom (isolate 0.305, no thermals): 121.92,163.07 128.02,163.07 130.81,165.86 130.81,171.96 128.27,174.5 121.92,174.5 119.38,171.96 119.38,165.61
  pour Bottom (isolate 0.305, no thermals): 23.11,162.81 28.7,162.81 31.75,165.86 31.75,171.7 28.96,174.5 23.11,174.5 20.07,171.45 20.07,165.86
  pour Top (isolate 0.305, no thermals): 23.11,162.81 28.7,162.81 31.75,165.86 31.75,171.7 28.96,174.5 23.11,174.5 20.07,171.45 20.07,165.86
  pour Top (isolate 0.305, no thermals): 121.92,163.07 128.02,163.07 130.81,165.86 130.81,171.96 128.27,174.5 121.92,174.5 119.38,171.96 119.38,165.61
  pour Top (isolate 0.305, no thermals): 152.15,162.81 157.73,162.81 160.78,165.86 160.78,171.7 157.99,174.5 151.64,174.5 149.1,171.96 149.1,165.86
  cutout Top (isolate 0.254): 58.67,123.7 66.29,123.7 68.58,125.98 68.58,126.49 68.58,128.02 65.53,128.02 65.53,136.65 58.67,136.65
  cutout Bottom (isolate 0.254): 55.37,134.11 55.37,125.98 57.66,123.7 66.29,123.7 68.58,125.98 68.58,134.11 66.29,136.4 63.75,136.4 63.75,132.84 60.45,132.84 60.45,136.4 57.66,136.4
  cutout Bottom (isolate 0.254): 55.37,76.45 55.37,68.33 57.66,66.04 66.29,66.04 68.58,68.33 68.58,76.45 66.29,78.74 63.75,78.74 63.75,74.93 60.71,74.93 60.71,78.74 57.66,78.74
  cutout Top (isolate 0.254): 58.67,78.74 58.67,66.04 66.29,66.04 68.58,68.33 68.58,70.36 65.53,70.36 65.53,78.74
IDEAL_D1:N$1
  Top 0.2: NM1101.1 23.19,61.78 23.95,62.54 28.7,62.54 29.25,61.99 30.33,61.99 IDD1101.11
IDEAL_D1:N$4
  Top 0.152: 36.78,62.01 C1101.1
  Top 0.406: IDD1101.3 IDD1101.2 36.77,62.02 36.78,62.01
IS_BAT1  (via drill 0.35)
  Top 0.305: 75.06,76.33 v71.88,73.15
  Top 0.406: SEN101.7 75.06,76.33 75.69,75.69 78.99,75.69 80.26,76.96 80.26,86.87 90.42,97.03 104.14,97.03 105.41,95.76 R309.1
  Bottom 0.254: v71.88,73.15 69.43,70.7 R102.1
IS_BAT2  (via drill 0.35)
  Top 0.305: v71.88,130.56 75.31,133.99
  Top 0.406: SEN201.7 75.31,133.99 76.2,133.1 86.11,133.1 99.07,120.13 99.07,116.6 147.57,68.1 147.57,46.88 143.71,43.01 R311.1
  Bottom 0.305: R202.1 67.82,129.03 69.34,130.56 v71.88,130.56
IS_LOAD  (via drill 0.35)
  Top 0.254: SEN601.7 20.93,141.35 21.25,141.04 21.25,137.97 16.51,133.23 v16.51,72.9 | R305.1 34.2,32.09 v34.04,32.26
  Bottom 0.254: v16.51,72.9 16.51,43.94 28.19,32.26 v34.04,32.26
IS_PDU_3.3V  (via drill 0.35)
  Top 0.203: v69.85,167.39 70,167.54 PDU1201.8
  Bottom 0.2: v69.85,167.39 69.85,164.17 R1204.2
  Bottom 0.406: R307.1 142.4,99.16 82.72,158.84 C1209.2 R1204.2
IS_PDU_5V  (via drill 0.35)
  Top 0.203: PDU901.8 40.54,157.38 v40.39,157.23
  Top 0.406: v99.57,129.54 100.08,129.03 100.08,117.35 148.59,68.83 148.59,35.81 144.27,31.5 142.84,31.5 R306.1
  Bottom 0.2: 42.2,154.09 46.4,154.09 48.01,152.48 C909.2 | 42.2,154.09 40.39,155.9 v40.39,157.23 | R904.2 43.94,152.34 42.2,154.09
  Bottom 0.406: C909.2 57.75,151.73 61.72,155.7 73.41,155.7 v99.57,129.54
IS_PV  (via drill 0.35)
  Top 0.305: v34.29,45.21 74.93,45.21 77.3,47.59 R301.1 | SEN501.7 20.95,67.69 21.34,67.31 v21.34,58.67
  Bottom 0.305: v34.29,45.21 21.34,58.17 v21.34,58.67
LOAD_BUS
  Top 0.203: 49.78,170.69 51.22,169.25 C1201.1 | 3V3_PDU.3 49.78,170.69 | 49.78,170.69 39.62,170.69 39.12,171.2 5V_PDU.3
  pour Top (isolate 0.254): 26,142.29 24,142.29 24,144.59 21,147.59 21,160.59 29,160.59 29,147.59 26,144.59
  pour Top (isolate 0.254): 43.9,159.49 43.9,158.39 21,158.39 21,160.99 39.4,160.99 40.9,159.49
  pour Top (isolate 0.254, no thermals): 13.62,162.76 8.45,162.76 4.68,166.53 4.68,171.28 8.19,174.79 14.05,174.79 17.31,171.53 17.31,165.47 22.2,160.58 22.2,154.19
  pour Top (isolate 0.254): 28.82,160.89 33.02,165.09 33.02,168.43 35.86,171.28 67.81,171.28 69.5,169.59 73.7,169.59 73.7,168.59 36.3,168.59 35.01,167.29 35.01,160.89
  pour Top (isolate 0.305): 37.34,160.53 33.53,164.34 32.77,163.58 32.77,160.53
  pour Top (isolate 0.254): 35.81,171.2 37.85,173.23 41.15,173.23 43.43,170.94 43.43,170.43 36.58,170.43
  pour Top (isolate 0.254): 45.97,171.2 48.01,173.23 50.04,173.23 51.05,173.23 52.32,171.96 53.59,170.69 53.59,170.18 45.97,170.18
N$6
  Top 0.254: IDD1101.8 26.63,63.97 26.24,63.58 NM1101.3
  pour Top (isolate 0.254): 24,62.69 26,62.69 26,67.99 24,67.99
PDU_3.3V:N$1  (via drill 0.35)
  Top 0.2: PDU1201.17 80.98,170.14 v81.53,170.69
  Bottom 0.2: v81.53,170.69 82.97,170.69
  Bottom 0.3: 82.97,170.69 C1203.2
PDU_3.3V:N$2
  pour Top (isolate 0.254): 78.6,171.49 78.6,170.59 80.3,170.59 81.3,171.59 81.3,173.79 80,173.79 80,171.89 79.6,171.49
PDU_3.3V:N$3  (via drill 0.35)
  Top 0.2: PDU1201.14 80.48,168.19
  Top 0.3: 80.48,168.19 v80.52,168.15
  Bottom 0.2: v80.52,168.15 86.53,168.15
  Bottom 0.3: 86.53,168.15 C1204.2
PDU_3.3V:N$4  (via drill 0.35)
  Bottom 0.2: C1203.1 81.95,169.08
  Bottom 0.3: 81.95,169.08 v81.79,168.91
  pour Top (isolate 0.254): 78.6,169.69 78.6,168.59 88.3,168.59 88.3,171.19 83.6,171.19 82.1,169.69
PDU_3.3V:N$5
  Top 0.3: R1205.1 C1207.1
PDU_3.3V:N$6
  Top 0.2: C1207.2 69,174.17 C1206.1 71.73,171.44 PDU1201.2
PDU_3.3V:N$7  (via drill 0.35)
  Top 0.2: L1201.2 82.42,166.5 v81.79,167.13
  Bottom 0.2: C1204.1 83.65,166.54 83.05,167.13 v81.79,167.13
  pour Top (isolate 0.254): 78.6,167.59 78.6,166.69 82.2,166.69 83.7,165.19 88.3,165.19 88.3,167.59
PDU_3.3V:N$8
  Top 0.3: C1208.2 93.31,170.18 R1203.2
PDU_3.3V:N$9
  Top 0.2: R1202.2 66.13,173.06 66.47,172.72 C1206.2 68.75,171.89 69.83,170.81 73.26,170.81 PDU1201.3 73.9,170.79 74.35,171.24 74.35,175.42
  Top 0.3: 74.35,175.42 R1205.2 76.63,177.89 85.9,177.89 89.8,173.99 89.8,173.24 89.92,173.12 | 89.92,173.12 89.92,173.14 R1203.1 | 89.92,173.12 R1201.1
PDU_5V:N$1  (via drill 0.35)
  Top 0.2: PDU901.17 51.01,159.98 v51.31,160.27
  Bottom 0.2: v51.31,160.27 51.65,160.62 C903.2
PDU_5V:N$2
  pour Top (isolate 0.305): 48.9,161.39 48.9,160.49 50.6,160.49 51.6,161.49 51.6,163.69 50.3,163.69 50.3,161.79 49.9,161.39
PDU_5V:N$3  (via drill 0.35)
  Top 0.2: PDU901.14 51.01,158.03 v51.05,157.99
  Bottom 0.2: v51.05,157.99 56.3,157.99 C904.2
PDU_5V:N$4  (via drill 0.35)
  Bottom 0.2: v51.31,159 51.4,158.92 C903.1
  pour Top (isolate 0.254): 48.9,159.59 48.9,158.49 58.2,158.49 58.2,161.09 53.9,161.09 52.4,159.59
PDU_5V:N$5
  Top 0.2: R905.1 C907.1
PDU_5V:N$6
  Top 0.2: PDU901.2 42.77,161.28 C906.1 40.47,167.31 C907.2
PDU_5V:N$7  (via drill 0.35)
  Bottom 0.2: C904.1 51.9,156.38 v51.31,156.97
  pour Top (isolate 0.254): 48.9,157.49 48.9,156.59 52.5,156.59 54,155.09 58.2,155.09 58.2,157.49
PDU_5V:N$8
  Top 0.2: R903.2 67.1,160.78 67.56,160.32 C908.2
PDU_5V:N$9
  Top 0.2: 61.8,160.89 61.8,161.69 56.1,167.39 R905.2 46.06,166.35 44.5,164.79 44.5,160.99 44.14,160.63 PDU901.3 41.72,160.63 C906.2 38.77,165.28 R902.2 | 61.8,160.89 61.8,160.78 R903.1 | R901.1 61.72,160.89 61.8,160.89
PV
  Top 0.152: 25.09,61.37 NM1101.2
  Top 0.2: 25.09,61.37 IDD1101.12 IDD1101.1
  pour Top (isolate 0.254): 24,61.94 26,61.94 26,59.89 30.8,55.09 30.8,7.41 27.76,4.37 21.98,4.37 19.3,7.06 19.3,55.19 24,59.89
  pour Top (isolate 0.305): 25.65,61.98 35.31,61.98 35.81,61.47 35.81,58.42 30.48,53.09 25.65,57.91
  pour Top (isolate 0.254, no thermals): 24.89,4.83 27.43,4.83 30.23,7.62 30.23,7.87 30.23,12.95 27.43,15.75 22.35,15.75 19.56,12.95 19.56,8.13 19.56,7.62 22.35,4.83
PV_BUS  (via drill 0.35)
  Top 0.305: M101.2 40.77,69.22 39.88,68.33 39.88,48.51 41.15,47.24 71.37,47.24 82.13,58 R303.1 | v40.13,69.85 40.77,70.48 M101.1
  Top 0.406: M201.2 40.51,126.87 40.13,126.49 v40.13,120.9
  Bottom 0.305: R103.1 40.89,61.98 40.13,62.74 v40.13,69.85
  Bottom 0.406: v40.13,120.9 40.13,120.4 40.64,119.89 R203.1
  pour Top (isolate 0.254): 30.1,68.49 24,68.49 24,70.79 21,73.79 21,136.59 24,139.59 24,141.84 30.1,141.84
  pour Top (isolate 0.254): 38.95,68.29 38.95,148.69 29.8,148.69 29.8,68.29 30.8,67.29 37.95,67.29
  pour Top (isolate 0.254): 43.3,70.94 35.9,70.94 35.9,68.74 43.3,68.74
  pour Top (isolate 0.254): 43.3,129.15 35.9,129.15 35.9,126.19 43.3,126.19
  pour Top (no thermals): 26.92,141.48 30.48,141.48 30.48,147.32 29.97,147.32 26.92,144.27
SENS_LOAD:5V_REF
  Top 0.254: SEN601.8 17.91,140.08 17.65,140.34 VREF602.6 13.84,140.34 13.21,140.97 C602.1 C605.1 17.02,143.51 17.91,142.62 SEN601.6
SENS_PV:5V_REF
  Top 0.406: VREF502.6 13.84,66.42 12.7,65.28 C502.1 C505.1 | C505.1 18.88,62.57 19.91,63.59 SEN501.8 | C505.1 17.78,68.33 18.41,68.96 SEN501.6
SPI_MISO  (via drill 0.35)
  Top 0.254: v116.84,32.77 118.11,32.77 118.66,33.31 IC301.17
  Bottom 0.305: 55.63,55.58 55.63,57.15 57.46,58.98 57.46,63.54 57.91,63.99 57.91,110.24 55.65,112.5 PIC201.16 | 55.63,55.58 PIC101.16 | v116.84,32.77 114.55,32.77 113.54,33.78 79.5,33.78 75.69,37.59 75.69,50.29 73.15,52.83 57.02,52.83 55.63,54.23 55.63,55.58
SPI_MOSI  (via drill 0.35)
  Top 0.254: v112.78,34.54 113.79,34.54 116.33,32 118.36,32 119.31,32.95 IC301.16
  Bottom 0.305: PIC201.15 56.3,112.82 56.69,112.82 58.67,110.84 58.67,59.18 56.3,56.8 PIC101.15 56.3,54.54 57.12,53.72 73.53,53.72 76.45,50.8 76.45,38.1 80.01,34.54 v112.78,34.54
SPI_SCLK  (via drill 0.35)
  Top 0.254: IC301.20 116.71,34.93 116.33,35.31 v114.55,35.31
  Top 0.305: v56.39,64.12 56.41,64.14 59.06,64.14 v59.44,64.52
  Bottom 0.305: PIC201.14 56.3,115.64 59.44,112.5 v59.44,64.52 59.49,64.46 59.49,56.6 61.48,54.61 73.91,54.61 77.22,51.31 77.22,38.61 80.52,35.31 v114.55,35.31 | PIC101.14 56.3,64.02 v56.39,64.12
VS_BAT1  (via drill 0.35)
  Top 0.305: v74.93,74.17 75.69,74.17 76.33,73.53 SEN101.3
  Top 0.406: R308.1 90.51,94.58 86.57,90.64 86.57,77.72 CELL1.BB1.P
  Bottom 0.305: R101.1 68.16,74.17 v74.93,74.17
  pour Top (isolate 0.254): 75.95,73.66 75.95,70.87 80.26,70.87 81.79,72.39 84.84,72.39 86.11,73.66 86.11,76.2 85.09,77.22 82.55,77.22 81.28,75.95 81.28,74.93 80.01,73.66
  pour Top (isolate 1.27, no thermals): 81.79,72.64 84.84,72.64 85.85,73.66 85.85,74.17 85.85,75.95 84.84,76.96 82.8,76.96 81.53,75.69 81.53,73.66 81.79,73.41
VS_BAT2  (via drill 0.35)
  Top 0.305: v74.42,131.83 75.95,131.83 76.58,131.19 SEN201.3
  Top 0.406: CELL2.BB1.P 83.78,122.72 90.42,116.08 98.04,116.08 146.56,67.56 146.56,55.12 144.18,52.74 R310.1
  Bottom 0.305: R201.1 63.84,130.64 65.02,131.83 v74.42,131.83
  pour Top (isolate 0.254): 76.2,131.06 76.2,128.52 80.52,128.52 81.28,127.76 81.28,126.75 82.8,125.22 84.84,125.22 86.36,126.75 86.36,128.27 84.58,130.05 81.53,130.05 80.52,131.06
  pour Top (isolate 1.27, no thermals): 81.53,126.75 82.8,125.48 84.84,125.48 86.11,126.75 86.11,128.27 84.58,129.79 82.3,129.79 82.04,129.54 81.53,129.03

## Text on the board
tPlace: BDC Prototype V2.3 | FRDET + MPPT | Juan J. Rojas / Adrian Wenzel
bPlace: BDC Prototype V2.3 | FRDET + MPPT | Juan J. Rojas / Adrian Wenzel
tNames: Off | Off | On | On | LOAD BUS | GND | 3.3V PL | GND | 5V PL | GND | PV (+) | PV (-)